# Altium PCB MB.PcbDoc
Units mil, origin at the board's own origin, x right, y up, seen from the top; angles counter-clockwise.
Board outline 5245 x 4225 mil, 2 copper layers (Top Layer, Bottom Layer); 58 components, 60 nets, 333 pads, 0 vias.
Unrouted connection lines stored in the file: 35.
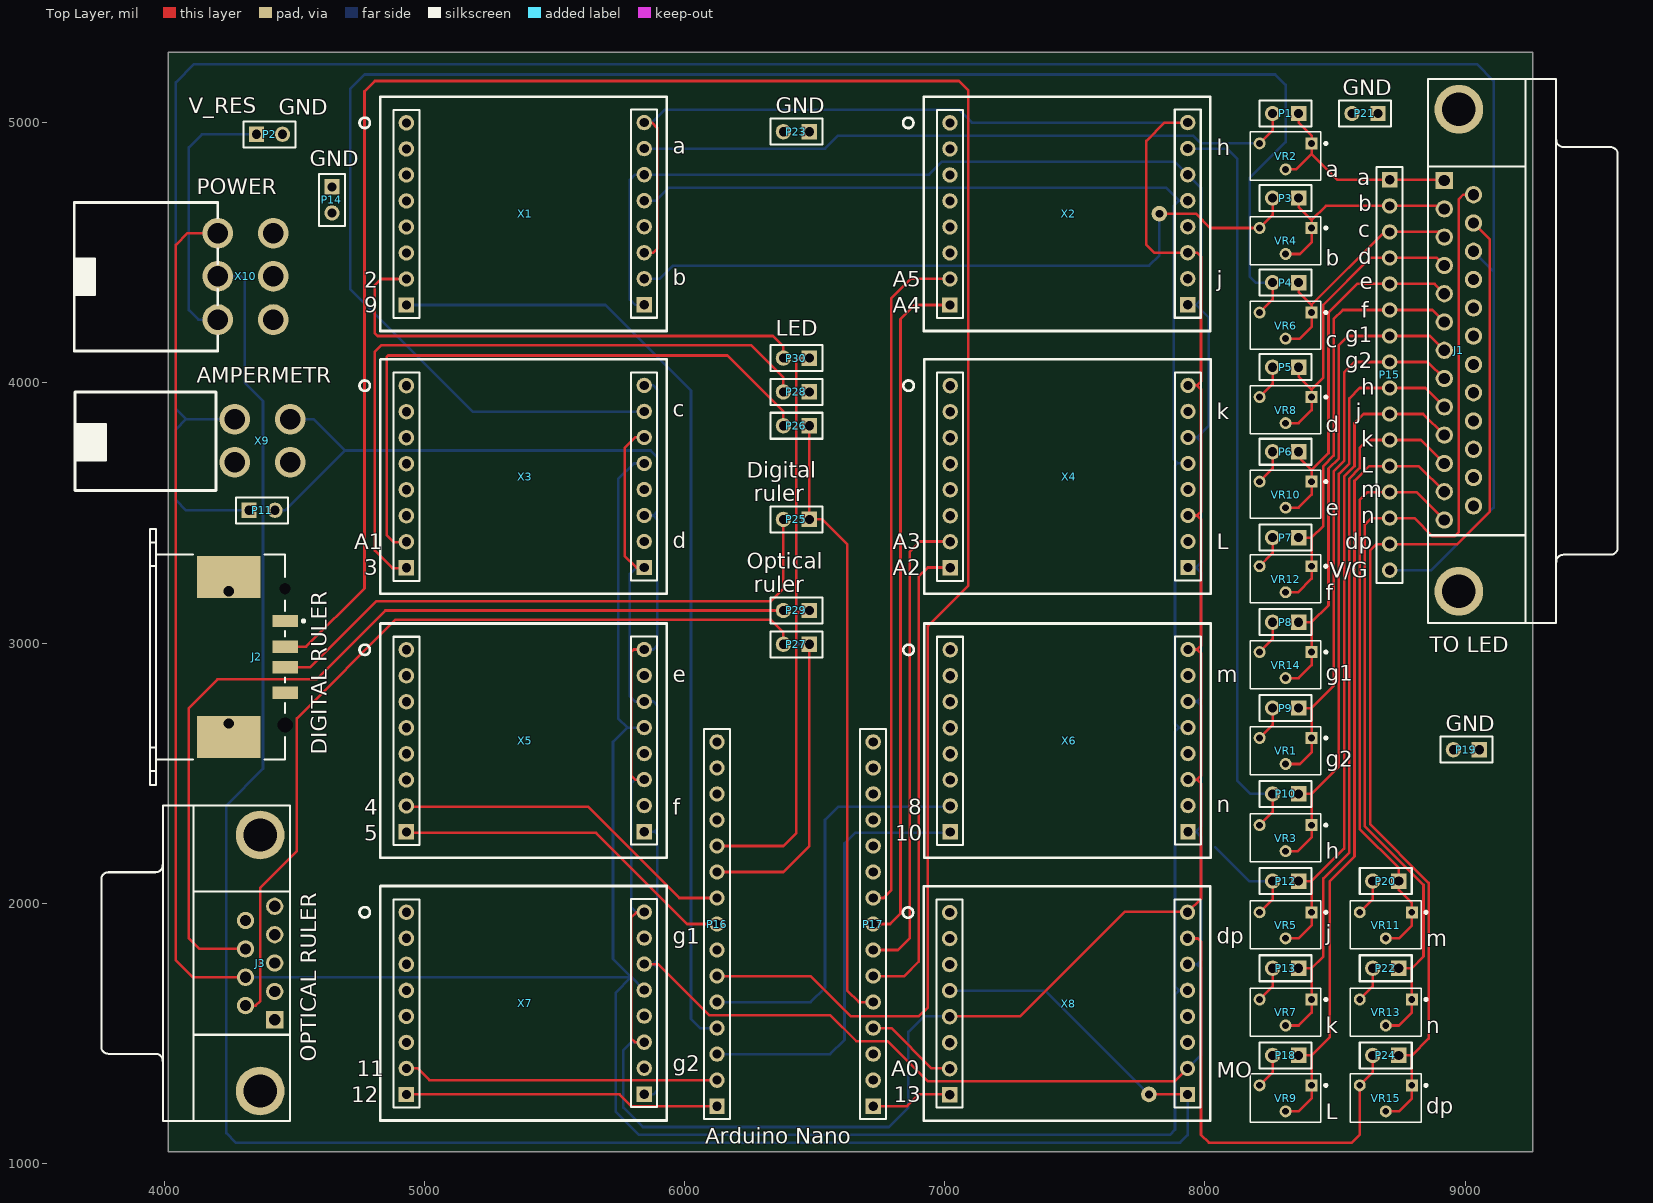
[diagram p0: Top Layer view]
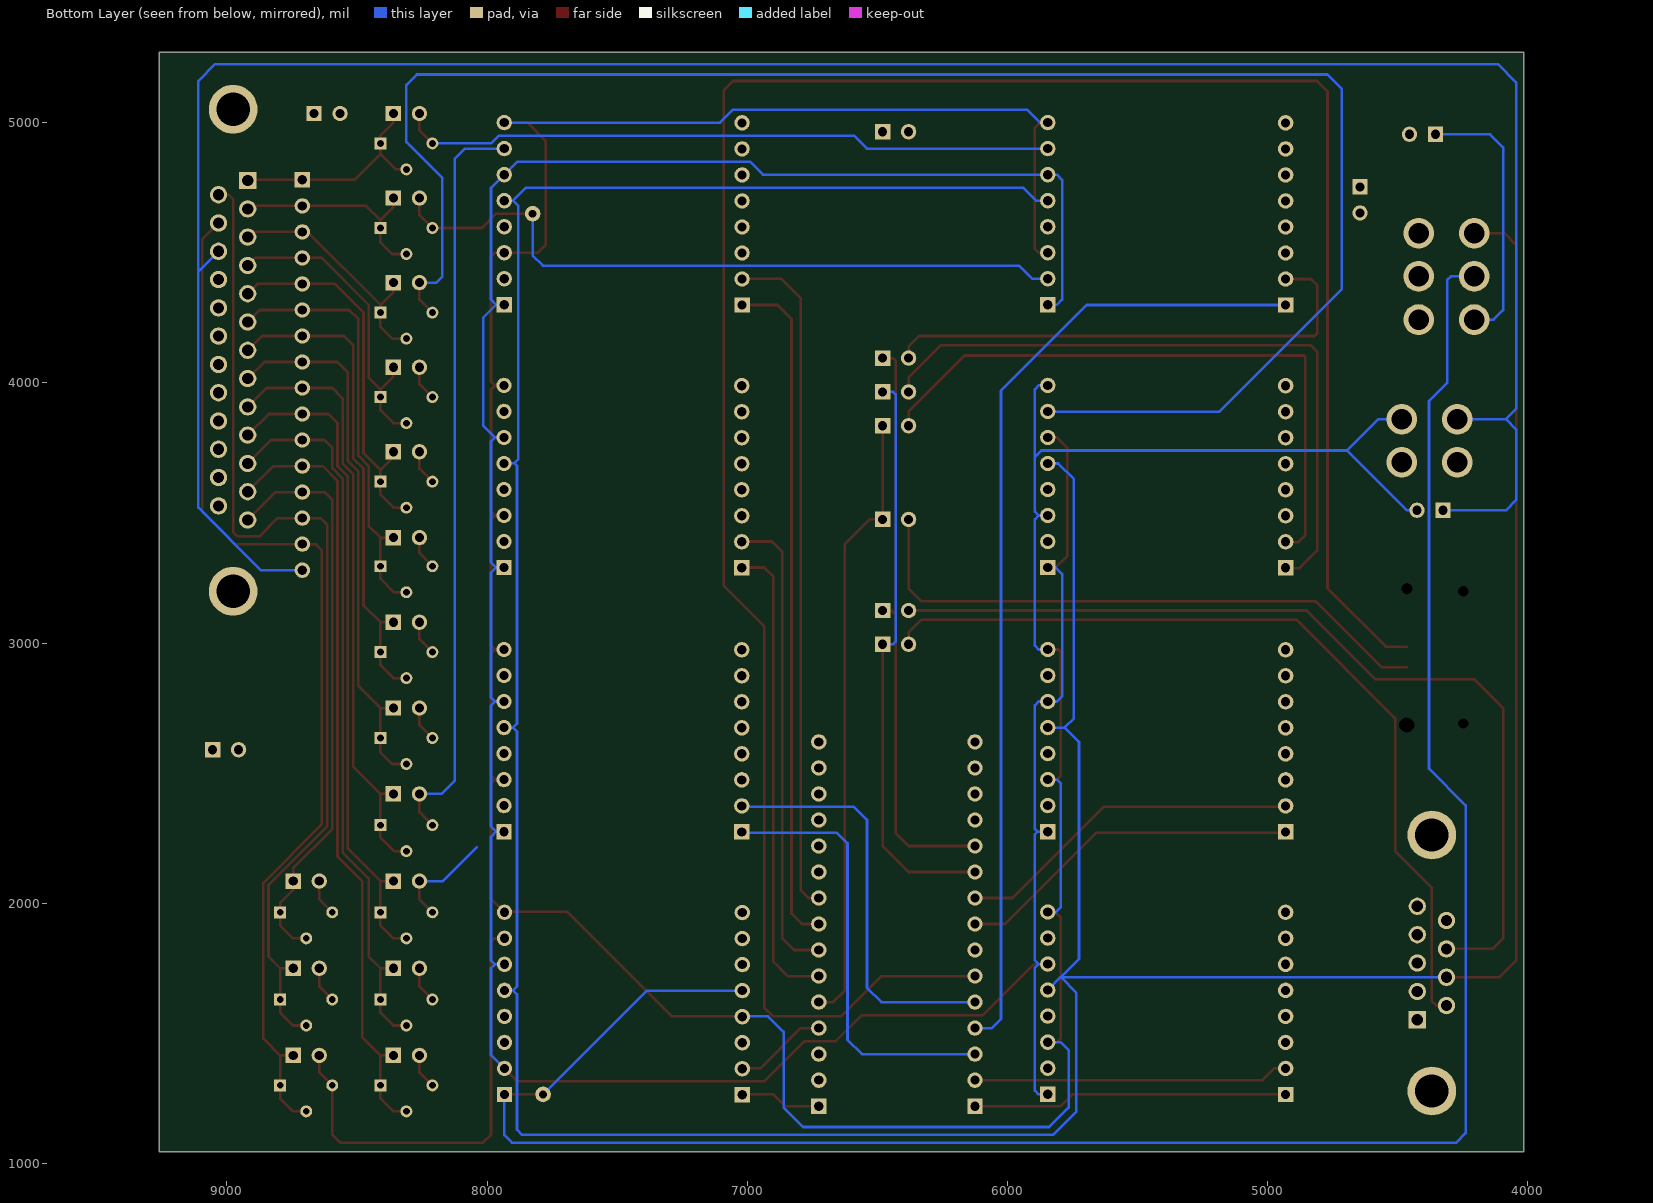
[diagram p1: Bottom Layer view, seen from below]

## Layer stack, top to bottom
Top Solder: solder mask 0.4, Solder Resist, Dk 3.5
Top Layer: signal copper 1.4
Dielectric 1: dielectric 12.6, FR-4, Dk 4.8
Bottom Layer: signal copper 1.4
Bottom Solder: solder mask 0.4, Solder Resist, Dk 3.5

## Board outline
4015,1045 9260,1045 9260,5270 4015,5270

## Design rules (kind name [scope] priority, off if disabled: settings)
Clearance [All] p1: gap=10 ignorepadtopadclearanceinfootprint=FALSE except(0: Arc-Hole Track-Hole SMDPad-Hole THPad-Hole Via-Hole Fill-Hole Poly-Hole Region-Hole Text-Hole)
PolygonConnect [All] p1: connectstyle=Relief reliefconductorwidth=10 reliefentries=4 polygonreliefangle="90 Angle" airgapwidth=10
RoutingVias [All] p1: holewidth=28 width=50 viastyle="Through Hole" minholewidth=28 minwidth=50 maxholewidth=28 maxwidth=50
SolderMaskExpansion [All] p1: expansion=4 istentingtop=FALSE
Width [All] p1: maxlimit=10 minlimit=10 preferedwidth=10
30 further rules are at their usual default settings.

## Components (designator, comment, footprint, x,y, rotation, side; value= is the part's Value field where it differs from the comment)
J1 "D Connector 25" DSUB1.385-2H25A 9350,4125 r270 top
J2 "1-353576-1" 353576 3968.94,2946.7 r180 top
J3 "D Connector 9" DSUB1.385-2H9 3995,1770 r90 top
P1 "Header 2" HDR1X2 8360,5035 r180 top
P2 "Header 2" HDR1X2 4355,4955 r0 top
P3 "Header 2" HDR1X2 8360,4710 r180 top
P4 "Header 2" HDR1X2 8360,4385 r180 top
P5 "Header 2" HDR1X2 8360,4060 r180 top
P6 "GND" HDR1X2 8360,3735 r180 top
P7 "GND" HDR1X2 8360,3405 r180 top
P8 "GND" HDR1X2 8360,3080 r180 top
P9 "GND" HDR1X2 8360,2750 r180 top
P10 "Header 2" HDR1X2 8360,2420 r180 top
P11 "Header 2" HDR1X2 4326.18,3510 r0 top
P12 "Header 2" HDR1X2 8360,2085 r180 top
P13 "GND" HDR1X2 8360,1750 r180 top
P14 "GND" HDR1X2 4645,4752.85 r270 top
P15 "Header 16" HDR1X16 8710,4780 r270 top
P16 "Header 15" HDR1X15 6125,1220 r90 top
P17 "Header 15" HDR1X15 6725,1220 r90 top
P18 "GND" HDR1X2 8360,1415 r180 top
P19 "GND" HDR1X2 9055,2590 r180 top
P20 "GND" HDR1X2 8745,2085 r180 top
P21 "GND" HDR1X2 8665,5035 r180 top
P22 "GND" HDR1X2 8745,1750 r180 top
P23 "GND" HDR1X2 6480,4965 r180 top
P24 "GND" HDR1X2 8745,1415 r180 top
P25 "Digit_rul" HDR1X2 6480,3475 r180 top
P26 "Relay" HDR1X2 6480,3835 r180 top
P27 "Optic_rul" HDR1X2 6480,2995 r180 top
P28 "Relay" HDR1X2 6480,3965 r180 top
P29 "Optic_ruler" HDR1X2 6480,3125 r180 top
P30 "Relay" HDR1X2 6480,4094.98 r180 top
VR1 "RES 3266W" "RES 3266W" 8410,2635 r180 top
VR2 "RES 3266W" "RES 3266W" 8410,4920 r180 top
VR3 "RES 3266W" "RES 3266W" 8410,2300 r180 top
VR4 "RES 3266W" "RES 3266W" 8410,4595 r180 top
VR5 "RES 3266W" "RES 3266W" 8410,1965 r180 top
VR6 "RES 3266W" "RES 3266W" 8410,4270 r180 top
VR7 "RES 3266W" "RES 3266W" 8410,1630 r180 top
VR8 "RES 3266W" "RES 3266W" 8410,3945 r180 top
VR9 "RES 3266W" "RES 3266W" 8410,1300 r180 top
VR10 "RES 3266W" "RES 3266W" 8410,3620 r180 top
VR11 "RES 3266W" "RES 3266W" 8795,1965 r180 top
VR12 "RES 3266W" "RES 3266W" 8410,3295 r180 top
VR13 "RES 3266W" "RES 3266W" 8795,1630 r180 top
VR14 "RES 3266W" "RES 3266W" 8410,2965 r180 top
VR15 "RES 3266W" "RES 3266W" 8795,1300 r180 top
X1 "MEZ_RELAY" MEZ_RELAY 4931,4999 r0 top
X2 "MEZ_RELAY" MEZ_RELAY 7020,4999 r0 top
X3 "MEZ_RELAY" MEZ_RELAY 4931,3989 r0 top
X4 "MEZ_RELAY" MEZ_RELAY 7021,3989 r0 top
X5 "MEZ_RELAY" MEZ_RELAY 4931,2974 r0 top
X6 "MEZ_RELAY" MEZ_RELAY 7021,2974 r0 top
X7 "MEZ_RELAY" MEZ_RELAY 4931,1965 r0 top
X8 "MEZ_RELAY" MEZ_RELAY 7019,1964 r0 top
X9 "AMPERMETR" AMP_VOLTMETER 4484.69,3860 r270 top
X10 "POWER" POWER 4206.18,4575 r90 top

## Footprints (in the part's own frame and the unit in brackets; to place one, negate y for a bottom-side part, rotate by r counter-clockwise, add the part's x,y. Pads: shape width x height; smd on the part's side, far side on the other; paste and mask are expansions set on the pad)
353576 [mm] "Connector; USB1.1, Type A, SM; 4 Position; Right Angle"
  rect 2.5x1.2 smd: 1(-12.6,-3.5) 2(-12.6,-1) 3(-12.6,1) 4(-12.6,3.5)
  rect 6.2x4.1 smd: 5(-7.1,7.8) 6(-7.1,-7.8)
  round 0.7 hole 1 unplated: MH1(-7.1,6.496) MH2(-7.1,-6.404)
  round 1.2 hole 1.5 unplated: MH3(-12.6,6.65)
  round 0.8 hole 1.1 unplated: MH4(-12.6,-6.65)
  silkscreen extent -14.53,-12.5 0.6,12.5
AMP_VOLTMETER [mm] "AMP_VOLTMETER"
  round 3 hole 2: 1(0,0) 2(0,-5.423) 3(4.2,-5.423) 4(4.2,0)
  silkscreen extent -2.66,-21 6.94,-7.25
DSUB1.385-2H9 [mm] "Connector; D Subminiature; 9 Position; Right Angle; Pitch 1.385 mm"
  rect 1.69x1.69 hole 1.09: 1(-5.54,-10.92)
  round 1.69 hole 1.09: 2(-2.77,-10.92) 3(0,-10.92) 4(2.77,-10.92) 5(5.54,-10.92) 6(-4.155,-8.08) 7(-1.385,-8.08) 8(1.385,-8.08) 9(4.155,-8.08)
  round 4.76 hole 3.26: 10(-12.495,-9.5) 11(12.495,-9.5)
  silkscreen extent -15.4,-12.4 15.4,6
DSUB1.385-2H25A [mm] "Connector; D Subminiature; 25 Position; Right Angle; Pitch 1.385 mm"
  rect 1.69x1.69 hole 1.09: 1(-16.566,-10.92)
  round 1.69 hole 1.09: 2(-13.805,-10.92) 3(-11.044,-10.92) 4(-8.283,-10.92) 5(-5.522,-10.92) 6(-2.761,-10.92) 7(0,-10.92) 8(2.761,-10.92) 9(5.522,-10.92) 10(8.283,-10.92) 11(11.044,-10.92) 12(13.805,-10.92) 13(16.566,-10.92) 14(-15.185,-8.08) 15(-12.424,-8.08) 16(-9.663,-8.08) 17(-6.902,-8.08) 18(-4.141,-8.08) 19(-1.38,-8.08) 20(1.381,-8.08) 21(4.142,-8.08) 22(6.903,-8.08) 23(9.664,-8.08) 24(12.425,-8.08) 25(15.186,-8.08)
  round 4.76 hole 3.26: 26(-23.526,-9.5) 27(23.526,-9.5)
  silkscreen extent -26.5,-12.5 26.6,6
HDR1X2 [mm] "Connector; Header; 2 Position"
  rect 1.5x1.5 hole 0.9: 1(0,0)
  round 1.5 hole 0.9: 2(2.54,0)
  silkscreen extent -1.27,-1.27 3.81,1.27
HDR1X15 [mm] "Connector; Header; 15 Position"
  rect 1.5x1.5 hole 0.9: 1(0,0)
  round 1.5 hole 0.9: 2(2.54,0) 3(5.08,0) 4(7.62,0) 5(10.16,0) 6(12.7,0) 7(15.24,0) 8(17.78,0) 9(20.32,0) 10(22.86,0) 11(25.4,0) 12(27.94,0) 13(30.48,0) 14(33.02,0) 15(35.56,0)
  silkscreen extent -1.27,-1.27 36.83,1.27
HDR1X16 [mm] "Connector; Header; 16 Position"
  rect 1.5x1.5 hole 0.9: 1(0,0)
  round 1.5 hole 0.9: 2(2.54,0) 3(5.08,0) 4(7.62,0) 5(10.16,0) 6(12.7,0) 7(15.24,0) 8(17.78,0) 9(20.32,0) 10(22.86,0) 11(25.4,0) 12(27.94,0) 13(30.48,0) 14(33.02,0) 15(35.56,0) 16(38.1,0)
  silkscreen extent -1.27,-1.27 39.37,1.27
MEZ_RELAY [mm] "мезонин реле"
  round 1.5 hole 0.9: 1(0,0) 2(0,-2.54) 3(0,-5.08) 4(0,-7.62) 5(0,-10.16) 6(0,-12.7) 7(0,-15.24) 10(23.216,-15.215) 11(23.216,-12.675) 12(23.216,-10.135) 13(23.216,-7.595) 14(23.216,-5.055) 15(23.216,-2.515) 16(23.216,0.025)
  rect 1.5x1.5 hole 0.9: 8(0,-17.78) 9(23.216,-17.755)
  silkscreen extent -4.57,-20.32 25.43,2.57
POWER [mm] "POWER"
  round 3 hole 2: 1(0,0) 2(-4.217,0) 3(-8.435,0) 4(0,-5.422) 5(-4.217,-5.422) 6(-8.435,-5.422)
  silkscreen extent -11.5,0 3,14
"RES 3266W" [mm]
  rect 1.168x1.168 hole 0.66: 1(0,0)
  round 1.168 hole 0.66: 2(2.54,2.54) 3(5.08,0)
  silkscreen extent -1.49,-1.12 5.99,3.58, body extent -0.81,-1.02 5.9,3.48, height 8.77

## Part data
J1: "Receptacle Assembly, 25 Position, Right Angle", PackageDocument=U, DatasheetDocument=19-Mar-1999, Gender=Receptacle, LatestRevisionDate=17-Jul-2002, LatestRevisionNote="Re-released for DXP Platform.", Orientation="Right Angle", PackageReference=787202, Positions=25, Published=15-Jun-2001, Publisher="Altium Limited"
J2: "USB 1.1, Right Angle, SMT, A Type, Receptacle, 4 Position, White", PackageDocument=11-Apr-2003, ComponentLink1Description="Manufacturer Link", ComponentLink1URL=http://www.tycoelectronics.com/, ComponentLink2Description="Packaging Specification", ComponentLink2URL=http://ecommas.tycoelectronics.com/commerce/DocumentDelivery/DDEController?Action=showdoc&DocId=Customer+Drawing%7F353576%7FD%7Ftif%7FJapanese%7FJPN_CD_353576_D.tif, ContactMaterial="Copper Alloy", ContactPlating="Gold over Palladium Nickel", DatasheetDocument=11-Apr-2003, DrillSize="Corresponds to nominal value.", HousingMaterial=Thermoplastic, PackageReference=353576, PanelGround=Without, PCB_Layout="Complies with manufacturer's recommendation.", Published=15-Jul-2004, Publisher="Altium Limited"
J3: "Receptacle Assembly, 9 Position, Right Angle", PackageDocument=O, DatasheetDocument=1-Sep-1999, Gender=Receptacle, LatestRevisionDate=17-Jul-2002, LatestRevisionNote="Re-released for DXP Platform.", Orientation="Right Angle", PackageReference=788750, Positions=9, Published=15-Jun-2001, Publisher="Altium Limited"
P1 P2 P3 P4 P5 P10 P11 P12: "Header, 2-Pin", LatestRevisionDate=17-Jul-2002, LatestRevisionNote="Re-released for DXP Platform.", Publisher="Altium Limited"
P6 P7 P8 P9 P13 P14 P18 P19 P20 P21 P22 P23 P24 P25 P26 P27 P28 P29 P30: library part "Header 2", "Header, 2-Pin", LatestRevisionDate=17-Jul-2002, LatestRevisionNote="Re-released for DXP Platform.", Publisher="Altium Limited"
P15: "Header, 16-Pin", LatestRevisionDate=17-Jul-2002, LatestRevisionNote="Re-released for DXP Platform.", Publisher="Altium Limited"
P16 P17: "Header, 15-Pin", LatestRevisionDate=17-Jul-2002, LatestRevisionNote="Re-released for DXP Platform.", Publisher="Altium Limited"
X9: library part AMP_VOLTMETR

## Free pads (board coordinates)
  round 60 hole 30: 3(7825,4650) 4(7785,1265)

## Nets (pads, with @x,y where several pads share a name; then routed paths per layer and width w, separated by ;. In a path a pad name is that pad's centre, name@x,y a point inside that pad or via, vN(x,y) a via of type N, cw(c..) or ccw(c..) an arc to the next point about the centre after c; other vN are vias at no path point)
a: P1.2 VR2.3 X1.15 | length 2533.8
  Top Layer w10: VR2.3 8260,4970 P1.2
  Bottom Layer w10: X1.15 6540,4900 6590,4950 7955,4950 7985,4920 VR2.3
A0: P17.4 X8.7 | length 359.2
  Top Layer w10: P17.4 6795,1520 6950,1365 X8.7@7020,1365
A1: P17.5 P25.1 P26.1 | length 2378
  Top Layer w10: P26.1 P25.1 6530,3475 6625,3380 6625,1665 6670,1620 P17.5
A1_relay: P26.2 X3.7 | length 2442.9
  Top Layer w10: X3.7@4931,3387.67 4882.33,3387.67 4855,3415 4855,4099.14 4860.86,4105 6165,4105 6380,3890 P26.2
A1_ruler: J2.3 P25.2 | length 2305.4
  Top Layer w10: J2.3 4562.33,2907.33 4815,3160 6330,3160 6380,3210 P25.2
A2: P17.6 X4.8 | length 1812.3
  Top Layer w10: P17.6 6845,1720 6900,1775 6900,3255 6935,3290 X4.8@7020,3290
A3: P17.7 X4.7 | length 1815.2
  Top Layer w10: P17.7 6820,1820 6865,1865 6865,3350 6905,3390 X4.7@7020,3390
A4: P17.8 X2.8 | length 2618.9
  Top Layer w10: P17.8 6790,1920 6830,1960 6830,4245 6884,4299 X2.8
A5: P17.9 X2.7 | length 2612.5
  Top Layer w10: P17.9 6765,2020 6795,2050 6795,4325 6870,4400 X2.7@7019,4400
a_0: J1.1 P1.1 P15.1 VR2.1 VR2.2 | length 853.2
  Top Layer w10: VR2.2 8350,4820 8410,4880 ; P1.1 8360,5000 8410,4950 VR2.1 8410,4880 ; J1.1 8917.28,4780 P15.1 8510,4780 8410,4880
b: P3.2 pad.3 VR4.3 X1.10 | length 2720.8
  Top Layer w10: pad.3 7965,4650 8020,4595 VR4.3 8260,4645 P3.2
  Bottom Layer w10: X1.10 5905,4400 5955,4450 7785,4450 7825,4490 pad.3
b_0: J1.2 P3.1 P15.2 VR4.1 VR4.2 | length 847
  Top Layer w10: VR4.2 8365,4495 8410,4540 VR4.1 8410,4625 ; P3.1 8360,4675 8410,4625 ; J1.2 8908.58,4680 P15.2 8465,4680 8410,4625
c: P4.2 VR6.3 X3.15 | length 6757
  Top Layer w10: VR6.3 8260,4320 P4.2
  Bottom Layer w10: X3.15@5845,3888.67 5186.33,3888.67 4715,4360 4715,5130 4770,5185 8270,5185 8310,5145 8310,4925 8172.01,4787.01 8172.01,4407.99 8195,4385 P4.2
c_0: J1.3 P4.1 P15.3 VR6.1 VR6.2 | length 944
  Top Layer w10: VR6.2 8365,4170 8410,4215 VR6.1 8410,4300 8690,4580 P15.3 8899.88,4580 J1.3 ; P4.1 8360,4349.09 8409.55,4299.55
d: P5.2 VR8.3 X3.10 | length 135.7
  Top Layer w10: VR8.3 8260,3995 P5.2
D2: P16.11 P29.1 P30.1 | length 2251.1
  Top Layer w10: P16.11 6380,2220 6430,2270 6430,3110 ; P29.1 6445,3125 6430,3110 ; P30.1 6439.98,4094.98 6430,4085 6430,3110
D2_relay: P30.2 X1.7 | length 1951.7
  Top Layer w10: X1.7 4834,4399 4810,4375 4810,4190 4820,4180 6340,4180 6380,4140 P30.2
D2_ruler: J3.8 P29.2 | length 3560.2
  Top Layer w10: J3.8 4135.47,1824.53 4095,1865 4095,2750 4205,2860 4585,2860 4850,3125 P29.2
D3: P16.10 P27.1 P28.1 | length 2229.7
  Top Layer w10: P16.10 6380,2120 6480,2220 P27.1
  Bottom Layer w10: P27.1 6440,2995 6430,3005 6430,3955 6440,3965 P28.1
D3_relay: P28.2 X3.8 | length 2601
  Top Layer w10: X3.8@4931,3287.67 4877.33,3287.67 4810,3355 4810,4120 4835,4145 6255,4145 6380,4020 P28.2
D3_ruler: J3.6 P27.2 | length 3300.7
  Top Layer w10: J3.6 4351.42,1606.42 4370,1625 4370,2060 4510,2200 4510,2710 4890,3090 5990,3090 6330,3090 6380,3040 P27.2
D4: P16.9 X5.7 | length 1339.5
  Top Layer w10: X5.7@4931,2371.33 5628.67,2371.33 5980,2020 P16.9
D5: P16.8 X5.8 | length 1337.6
  Top Layer w10: X5.8@4932.33,2270 5660,2270 6010,1920 P16.8
D7: J2.2 P16.6 | length 9136.7
  Top Layer w10: J2.2 4546.07,2986.07 4770,3210 4770,5120 4810,5160 7055,5160 7090,5125 7090,3220 6935,3065 6935,1600 6900,1565 6640,1565 6485,1720 P16.6
D8: P16.5 X6.7 | length 1584
  Bottom Layer w10: P16.5 6485,1620 6540,1675 6540,2320 6591.33,2371.33 X6.7@7020,2371.33
D9: P16.4 X1.8 | length 3759.8
  Bottom Layer w10: X1.8 5696,4299 6025,3970 6025,1555 6060,1520 P16.4
D10: P16.3 X6.8 | length 1689.9
  Bottom Layer w10: P16.3 6560,1420 6615,1475 6615,2230 6656.33,2271.33 X6.8@7020,2271.33
D11: P16.2 X7.7 | length 1212.6
  Top Layer w10: X7.7 4975,1365 5020,1320 P16.2
D12: P16.1 X7.8 | length 1212.6
  Top Layer w10: X7.8 5750,1265 5795,1220 P16.1
D13: P17.1 X8.8 | length 313.6
  Top Layer w10: P17.1 6855,1220 6900,1265 X8.8@7020,1265
d_0: J1.4 P5.1 P15.4 VR8.1 VR8.2 | length 1201.7
  Top Layer w10: VR8.2 8360,3845 8410,3895 VR8.1 8410,3975 ; P5.1 8360,4025 8410,3975 ; J1.4 8891.18,4480 P15.4 8635,4480 8455,4300 8455,4020 8410,3975
dp: P24.2 VR15.3 X8.15 | length 1759.7
  Top Layer w10: X8.15@7933,1864.33 7972.67,1864.33 7985,1852 7985,1110 8015,1080 8565,1080 8595,1110 VR15.3 8645,1350 P24.2
dp_0: J1.15 P15.15 P24.1 VR15.1 VR15.2 | length 4053.3
  Top Layer w10: VR15.2 8745,1200 8795,1250 VR15.1 8795,1415 ; P24.1 8795,1415 ; J1.15 9095,4551.04 9095,3505 8970,3380 P15.15 8660,3380 8635,3355 8635,2303.55 8860,2078.55 8860,1795 8860,1480 8795,1415
e: P6.2 VR10.3 X5.15 | length 135.7
  Top Layer w10: VR10.3 8260,3670 P6.2
e_0: J1.5 P6.1 P15.5 VR10.1 VR10.2 | length 1444.6
  Top Layer w10: VR10.2 8360,3520 8410,3570 VR10.1 8410,3665 ; P6.1 8360,3715 8410,3665 ; J1.5 8882.48,4380 P15.5 8585,4380 8475,4270 8475,3730 8410,3665
f: P7.2 VR12.3 X5.10 | length 135.7
  Top Layer w10: VR12.3 8260,3345 P7.2@8260,3410
f_0: J1.6 P7.1 P15.6 VR12.1 VR12.2 | length 1658.3
  Top Layer w10: VR12.2 8357.74,3195 8410,3247.26 VR12.1 8410,3405 8455,3450 8455,3680 8495,3720 8495,4245 8530,4280 P15.6 8873.78,4280 J1.6 ; P7.1 8405,3405
g1: P8.2 VR14.3 X7.15 | length 135.7
  Top Layer w10: VR14.3 8260,3015 P8.2
g1_0: J1.7 P8.1 P15.7 VR14.1 VR14.2 | length 1886.6
  Top Layer w10: VR14.2 8360,2865 8410,2915 VR14.1 8410,3080 ; P8.1 8410,3080 ; J1.7 8865.08,4180 P15.7 8550,4180 8515,4145 8515,3710 8475,3670 8475,3145 8410,3080
g2: P9.2 VR1.3 X7.10 | length 135.7
  Top Layer w10: VR1.3 8260,2685 P9.2
g2_0: J1.8 P9.1 P15.8 VR1.1 VR1.2 | length 2108.4
  Top Layer w10: VR1.2 8365,2535 8410,2580 VR1.1 8410,2750 ; P9.1 8410,2750 ; J1.8 8856.38,4080 P15.8 8575,4080 8535,4040 8535,3700 8495,3660 8495,2835 8410,2750
GND: J2.4 J3.2 P2.2 P14.1 P14.2 P16.12 P17.14 P19.1 P19.2 P21.1 P21.2 P23.1 P23.2 X1.12 X2.12 X3.12 X4.12 X5.12 X6.12 X7.12 X8.6 X8.11 X8.12 X10.4 X10.5 X10.6
h: P10.2 VR3.3 X2.15 | length 2894
  Top Layer w10: VR3.3 8260,2350 P10.2
  Bottom Layer w10: X2.15 8085,4900 8125,4860 8125,2470 8175,2420 P10.2
h_0: J1.9 P10.1 P15.9 VR3.1 VR3.2 | length 2330.6
  Top Layer w10: VR3.2 8356.89,2200 8410,2253.11 VR3.1 8410,2420 ; P10.1 8410,2420 ; J1.9 8847.68,3980 P15.9 8595,3980 8555,3940 8555,3690 8515,3650 8515,2525 8410,2420
j: P12.2 VR5.3 X2.10 | length 414.6
  Top Layer w10: VR5.3 8260,2015 P12.2
  Bottom Layer w10: 8040,2215 8170,2085 P12.2
j_0: J1.10 P12.1 P15.10 VR5.1 VR5.2 | length 2562.2
  Top Layer w10: VR5.2 8360,1865 8410,1915 VR5.1 8410,2085 ; P12.1 8410,2085 ; J1.10 8838.98,3880 P15.10 8610,3880 8575,3845 8575,3680 8535,3640 8535,2210 8410,2085
k: P13.2 VR7.3 X4.15 | length 140.7
  Top Layer w10: VR7.3 8260,1680 P13.2
k_0: J1.11 P13.1 P15.11 VR7.1 VR7.2 | length 2792
  Top Layer w10: VR7.2 8360,1530 8410,1580 VR7.1 8410,1750 ; P13.1 8410,1750 ; J1.11 8830.28,3780 P15.11 8625,3780 8595,3750 8595,3671.72 8555,3631.72 8555,2195 8455,2095 8455,1795 8410,1750
l: P18.2 VR9.3 X4.10 | length 135.7
  Top Layer w10: VR9.3 8260,1350 P18.2
l_0: J1.12 P15.12 P18.1 VR9.1 VR9.2 | length 3021.8
  Top Layer w10: VR9.2 8360,1200 8410,1250 VR9.1 8410,1415 ; P18.1 8410,1415 ; J1.12 8821.57,3680 P15.12 8631.57,3680 8575,3623.43 8575,2180 8480,2085 8480,1485 8410,1415
m: P20.2 VR11.3 X6.15 | length 140.7
  Top Layer w10: VR11.3 8645,2015 P20.2
m_0: J1.13 P15.13 P20.1 VR11.1 VR11.2 | length 2220.5
  Top Layer w10: VR11.2 8745,1865 8795,1915 VR11.1 8795,2000 8745,2050 P20.1 8745,2135 8595,2285 8595,3550 8625,3580 P15.13 8812.87,3580 J1.13
MASTER_OUT: X1.9 X1.14 X2.9 X2.14 X3.9 X3.14 X4.9 X4.14 X5.9 X5.14 X6.9 X6.14 X7.9 X7.14 X8.10 X8.14 | length 11687.6
  Top Layer w10: X7.14 5899,1766 6095,1570 6560,1570 6660,1470 6780,1470 6935,1315 7883,1315 X8.10 X8.10@7934,1366 ; X3.9 5815,3290 5770,3335 5770,3750 5810,3790 X3.14
  Bottom Layer w10: X7.14 5881,1766 ; X5.9 5885,2275 ; X3.9 5815,3290 5790,3265 5790,2795 5810,2775 X5.14 5880,2775 5895,2760 5895,2285 5885,2275 ; X1.9 5810,4300 5790,4320 5790,4780 5810,4800 X1.14 6940,4800 6990,4850 7884,4850 X2.14 7985,4749 7985,4320 7965,4300 ; X7.9@5846,1265 5880,1265 5895,1280 5895,1752 5881,1766 ; X8.10 7985,1417 7985,1750 7970,1765 ; X8.14 7970,1765 ; X2.9 7965,4300 ; X6.9 7965,2275 ; X6.14 7970,2775 ; X4.9 7965,3290 ; X4.14 7970,3790 ; 5881,1766 5895,1780 5895,2265 5885,2275 ; 7965,2275 7985,2255 7985,1780 7970,1765 ; 7965,2275 7985,2295 7985,2760 7970,2775 ; 7965,3290 7985,3270 7985,2790 7970,2775 ; 7965,3290 7985,3310 7985,3775 7970,3790 ; 7965,4300 8015,4250 8015,3835 7970,3790
n: P22.2 VR13.3 X6.10 | length 140.7
  Top Layer w10: VR13.3 8645,1680 P22.2
n_0: J1.14 P15.14 P22.1 VR13.1 VR13.2 | length 3907.2
  Top Layer w10: VR13.2 8745,1530 8795,1580 VR13.1 8795,1750 ; P22.1 8795,1750 ; J1.14 8992.85,4722.85 8975.98,4705.98 8975.98,3425.98 8960,3410 8875,3410 8805,3480 P15.14 8640.3,3480 8615,3454.7 8615,2295.27 8840,2070.27 8840,1795 8795,1750
V/G_FROM_A: P11.2 X1.11 X1.16 X2.11 X2.16 X3.11 X3.16 X4.11 X4.16 X5.11 X5.16 X6.11 X6.16 X7.11 X7.16 X8.5 X8.16 X9.1 | length 14012.6
  Top Layer w10: X7.16@5844,1965 5815,1965 5795,1945 5795,1480 5809,1466 X7.11 ; X5.11 5810,2475 5795,2490 5795,2965 5805,2975 X5.16 ; X1.11 5880,4500 5895,4515 5895,4980 5875,5000 X1.16 ; X8.5@7020,1565 7290,1565 7692.67,1967.67 7935.67,1967.67 7985,2017 7985,2460 7970,2475 ; X2.16 7845,5000 7775,4930 7775,4530 7805,4500 X2.11 7970,4500 7985,4485 7985,4005 7970,3990 ; X6.11 7970,2475 ; X6.16 7970,2975 ; X4.11 7970,3490 ; X4.16 7970,3990 ; 7970,2475 7985,2490 7985,2960 7970,2975 ; 7970,2975 7985,2990 7985,3475 7970,3490 ; 7970,3490 7985,3505 7985,3975 7970,3990
  Bottom Layer w10: P11.2 4465,3510 4695,3740 ; X9.1 4575,3860 4695,3740 ; X7.16@5844,1965 5815,1965 5795,1985 5795,2460 5810,2475 X5.11 ; X7.11 5796,1466 5765,1435 5765,1215 5840,1140 6785,1140 6860,1215 6860,1505 6920,1565 X8.5@7020,1565 ; X5.16 5880,2975 5895,2990 5895,3475 5880,3490 ; X3.11 5880,3490 ; X3.16 5880,3990 5895,3975 5895,3715 ; X1.16 5875,5000 5925,5050 7055,5050 7105,5000 X2.16 ; 4695,3740 5870,3740 5895,3715 ; 5880,3490 5895,3505 5895,3715
V/G_TO_A: J1.16 P11.1 P15.16 X9.2 | length 9492.9
  Bottom Layer w10: X9.2 4085,3860 ; P11.1 4085,3510 4045,3550 4045,3820 4085,3860 ; P15.16 8870,3280 9110,3520 9110,4427.34 ; J1.16 9110,4427.34 ; 4085,3860 4045,3900 4045,5155 4115,5225 9045,5225 9110,5160 9110,4427.34
V_LED: pad.4 X8.4 X8.9 X10.2 | length 8433.1
  Top Layer w10: pad.4 X8.9
  Bottom Layer w10: X10.2 4296.04,4408.96 4310,4395 4310,4000 4380,3930 4380,2517.2 4239.09,2376.3 4239.09,1115.91 4275,1080 7905,1080 7934,1109 X8.9@7934,1265 ; X8.4 7386,1664 pad.4
V_MB: J3.7 X1.13 X2.13 X3.13 X4.13 X5.13 X6.13 X7.13 X8.13 X10.1 | length 15533.1
  Top Layer w10: X10.1 4090,4575 4045,4530 4045,1780 4109.53,1715.47 J3.7
  Bottom Layer w10: J3.7 5795,1715.47 ; X3.13@5843.67,3690 5805,3690 5745,3630 5745,2710 5780,2675 ; X7.13 5795.53,1715.47 5795,1715.47 ; X5.13 5780,2675 ; X1.13 5890,4700 5940,4750 7850,4750 7900,4700 ; X8.13 7900,1665 ; X4.13@7934,3691 7895.34,3691 ; X2.13 7900,4700 ; X6.13 7900,2675 ; 5780,2675 5725,2620 5725,1785.47 5795,1715.47 ; 5795,1715.47 5735,1655.47 5735,1200 5825,1110 7865,1110 7885,1130 7885,1650 7900,1665 ; 7895.34,3691 7880.63,3705.71 7880.63,4650 7880,4650.63 7880,4680 7900,4700 ; 7895.34,3691 7885,3680.66 7885,2690 7900,2675 ; 7900,1665 7885,1680 7885,2660 7900,2675
V_RESERVE: P2.1 X10.3 | length 1032.3
  Bottom Layer w10: X10.3 4132.09,4242.91 4095,4280 4095,4905 4145,4955 P2.1
pads on no net: J1.17 J1.18 J1.19 J1.20 J1.21 J1.22 J1.23 J1.24 J1.25 J1.26 J1.27 J2.1 J2.5 J2.6 J2.MH1 J2.MH2 J2.MH3 J2.MH4 J3.1 J3.3 J3.4 J3.5 J3.9 J3.10 J3.11 P16.7 P16.13 P16.14 P16.15 P17.2 P17.3 P17.10 P17.11 P17.12 P17.13 P17.15 X1.1 X1.2 X1.3 X1.4 X1.5 X1.6 X2.1 X2.2 X2.3 X2.4 X2.5 X2.6 X3.1 X3.2 X3.3 X3.4 X3.5 X3.6 X4.1 X4.2 X4.3 X4.4 X4.5 X4.6 X5.1 X5.2 X5.3 X5.4 X5.5 X5.6 X6.1 X6.2 X6.3 X6.4 X6.5 X6.6 X7.1 X7.2 X7.3 X7.4 X7.5 X7.6 X8.1 X8.2 X8.3 X9.3 X9.4

## Silkscreen, mask and mechanical layers (free items; w line width, h text height)
Top Overlay:
  text "GND" at 8530,5105 h60
  text "V_RES" at 4095,5035 h60
  text "GND" at 6350,5035 h60
  text "GND" at 4440,5030 h60
  text "a" at 5955,4880 h60
  text "h" at 8045,4875 h60
  text "GND" at 4560,4832.85 h60
  text "a" at 8465,4790 h60
  text "a" at 8585,4760 h60
  text "b" at 8590,4660 h60
  text "c" at 8590,4560 h60
  text "d" at 8590,4455 h60
  text "b" at 8465,4450 h60
  text "b" at 5955,4375 h60
  text "A5" at 6800,4370 h60
  text "j" at 8045,4369.99 h60
  text "2" at 4770,4365 h60
  text "e" at 8595,4360 h60
  text "9" at 4770,4270 h60
  text "A4" at 6800,4270 h60
  text "f" at 8600,4250 h60
  text "LED" at 6350,4180 h60
  text "g1" at 8540,4154.99 h60
  text "c" at 8465,4135 h60
  text "g2" at 8540,4054.99 h60
  text "h" at 8600,3955 h60
  text "c" at 5955,3870 h60
  text "k" at 8045,3860 h60
  text "j" at 8580,3859.99 h60
  text "d" at 8465,3810 h60
  text "k" at 8600,3755 h60
  text "L" at 8600,3655 h60
  text "m" at 8600,3560 h60
  text "Digital /  ruler" at 6240,3545 h60
  text "e" at 8465,3490 h60
  text "n" at 8600,3460 h60
  text "d" at 5955,3365 h60
  text "A1" at 4730,3360 h60
  text "A3" at 6800,3360 h60
  text "L" at 8045,3360 h60
  text "dp" at 8540,3359.99 h60
  text "3" at 4770,3260 h60
  text "A2" at 6800,3260 h60
  text "V/G" at 8480,3250 h60
  text "Optical /  ruler" at 6240,3195 h60
  text "f" at 8465,3165 h60
  text "TO LED" at 8865,2965 h60
  text "g1" at 8465,2854.99 h60
  text "e" at 5955,2850 h60
  text "m" at 8045,2850 h60
  text "DIGITAL RULER" at 4625,2570 h60 r90
  text "g2" at 8465,2524.99 h60
  text "n" at 8045,2350 h60
  text "4" at 4770,2340 h60
  text "f" at 5955,2340 h60
  text "8" at 6860,2340 h60
  text "5" at 4770,2240 h60
  text "10" at 6810,2240 h60
  text "h" at 8465,2170 h60
  text "j" at 8465,1854.99 h60
  text "g1" at 5955,1844.99 h60
  text "dp" at 8045,1844.99 h60
  text "m" at 8850,1835 h60
  text "k" at 8465,1500 h60
  text "n" at 8850,1500 h60
  text "OPTICAL RULER" at 4585,1390 h60 r90
  text "g2" at 5955,1354.99 h60
  text "11" at 4740,1335 h60
  text "A0" at 6795,1335 h60
  text "MO" at 8045,1330 h60
  text "12" at 4720,1235 h60
  text "13" at 6805,1235 h60
  text "dp" at 8850,1189.99 h60
  text "L" at 8465,1170 h60
  text "Arduino Nano" at 6080,1075 h60